# Altium PCB Power_Taghsim.PcbDoc
Units mil, origin at the board's own origin, x right, y up, seen from the top; angles counter-clockwise.
Board outline 4734.03 x 2142.03 mil, 2 copper layers (Top Layer, Bottom Layer); 48 components, 17 nets, 121 pads, 7 vias.
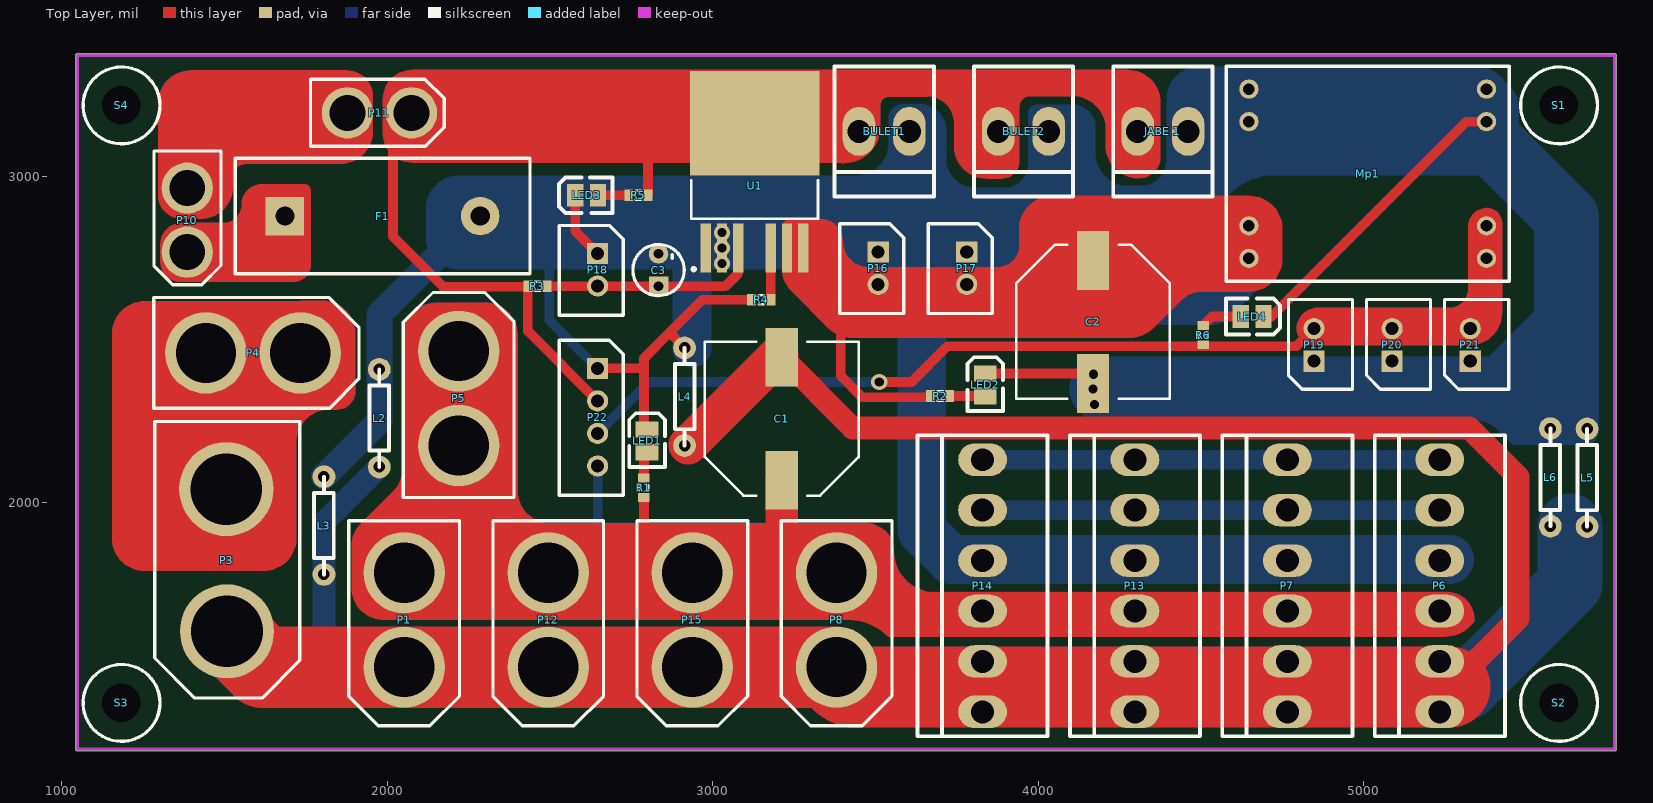
[diagram p0: Top Layer view]
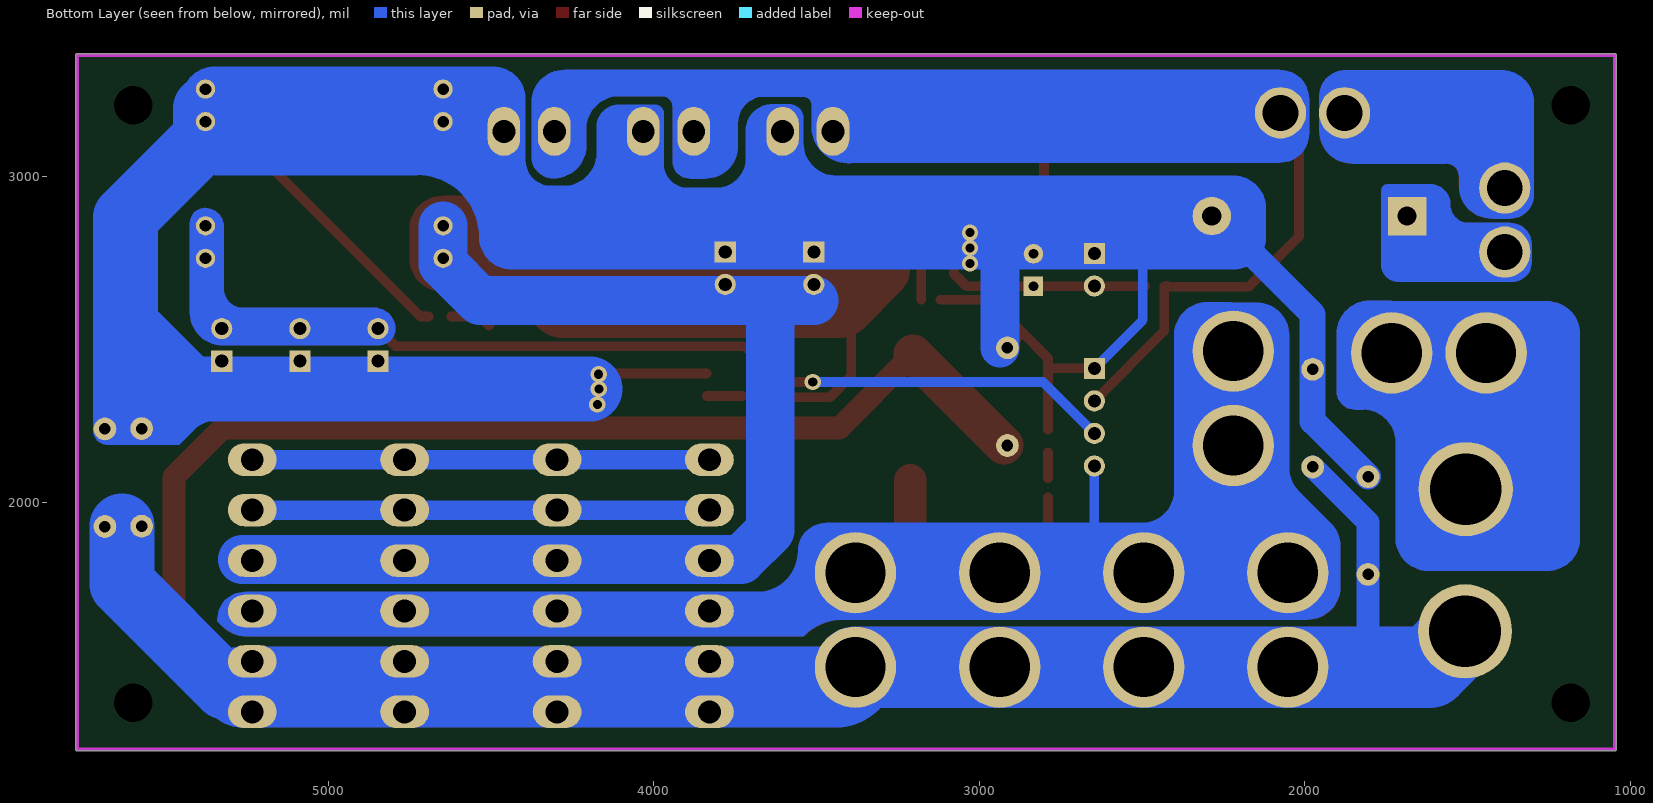
[diagram p1: Bottom Layer view, seen from below]

## Layer stack, top to bottom
Top Solder: solder mask 0.4, Solder Resist, Dk 3.5
Top Layer: signal copper 1.4
Dielectric 1: dielectric 12.6, FR-4, Dk 4.8
Bottom Layer: signal copper 1.4
Bottom Solder: solder mask 0.4, Solder Resist, Dk 3.5

## Board outline
1047,1235.98 cw(c1047,1241) 1041.98,1241 1041.98,3373 cw(c1047,3373) 1047,3378.01 5771,3378.01 cw(c5771,3373) 5776.02,3373 5776.02,1241 cw(c5771,1241) 5771,1235.98

## Design rules (kind name [scope] priority, off if disabled: settings)
AssemblyTestPointUsage [All] p1 off:
AssemblyTestpoint [All] p1 off: testpointundercomponent=TRUE minsize=40 maxsize=100 preferedsize=60 minholesize=0 maxholesize=40 preferedholesize=32 testpointgrid=1 usegrid=TRUE gridtolerance=0.01 allowsidetop=TRUE allowsidebottom=TRUE
Clearance Clearance_1 [All vs InPolygon] p1: gap=13 ignorepadtopadclearanceinfootprint=FALSE except(0: Arc-Hole Track-Hole SMDPad-Hole THPad-Hole Via-Hole Fill-Hole Poly-Hole Region-Hole Text-Hole)
Clearance [All] p2: gap=7 ignorepadtopadclearanceinfootprint=FALSE except(0: Arc-Hole Track-Hole SMDPad-Hole THPad-Hole Via-Hole Fill-Hole Poly-Hole Region-Hole Text-Hole)
ComponentClearance [All] p1 off: gap=10 collisioncheckmode=3 verticalgap=10 showdistances=FALSE
FabricationTestPointUsage [All] p1 off: valid=0 allowmultiple=FALSE
FabricationTestpoint [All] p1 off: side=3 testpointundercomponent=TRUE minsize=40 maxsize=100 preferedsize=60 minholesize=0 maxholesize=40 preferedholesize=32 testpointgrid=1 allowsidetop=TRUE allowsidebottom=TRUE usegrid=TRUE gridtolerance=0.01
Height [All] p1 off: minheight=0 maxheight=1000 prefheight=500
HoleSize [All] p1 off: absolutevalues=TRUE maxlimit=100 minlimit=1 maxpercent=80.000 minpercent=20.000
HoleToHoleClearance [All] p1 off: gap=10 allowstackedmicrovias=TRUE
LayerPairs [All] p1 off: enforce=TRUE
MinimumSolderMaskSliver [All] p1 off: minsoldermaskwidth=10
NetAntennae [All] p1 off: netantennaetolerance=0
PasteMaskExpansion [All] p1 off: expansion=0
PlaneConnect [All] p1: planeconnectstyle=Direct reliefexpansion=20 reliefentries=4 reliefconductorwidth=10 reliefairgap=10
PolygonConnect [All] p1: connectstyle=Direct reliefconductorwidth=10 reliefentries=4 polygonreliefangle="90 Angle" airgapwidth=10
RoutingVias [All] p1: holewidth=15.75 width=31.5 viastyle="Through Hole" minholewidth=11.81 minwidth=23.62 maxholewidth=28 maxwidth=50
SilkToSilkClearance [All] p1 off: silktosilkclearance=10
SilkToSolderMaskClearance [IsPad] p1 off: minsilkscreentomaskgap=10 clearancetoexposedcopper=TRUE
SolderMaskExpansion [All] p1 off: expansion=4
Width [All] p1: maxlimit=400 minlimit=10 preferedwidth=10
15 further rules are at their usual default settings.

## Components (designator, comment, footprint, x,y, rotation, side; value= is the part's Value field where it differs from the comment)
BULET1 "Ghofl dar" con2-tiwan 3526.5,3139 r0 top
BULET2 "Ghofl dar" con2-tiwan 3954.5,3139 r0 top
C1 "Cap Pol1" "Cap Alireza montazeri" 3243,2248 r90 top value=470uf
C2 "Cap Pol1" "Cap Alireza montazeri" 4136.61,2562.18 r270 top value=470uf
C3 "Cap Pol1" LED_3MM 2833,2713 r270 top value=470uf
F1 "20A Normal" FUSE 1985,2879 r180 top
"JABE 1" "Ghofl dar" con2-tiwan 4382.5,3139 r0 top
L2 "" R3P 1975,2258 r90 top value=100uH
L3 "" R3P 1805,1928 r90 top value=100uH
L4 "" R3P 2913,2324 r90 top value=100uH
L5 "" R3P 5686,2075 r90 top value=100uH
L6 "" R3P 5573,2076 r90 top value=100uH
LED1 "power" 3518 2798,2188 r90 top
LED2 "power" 3518 3837,2360 r90 top
LED3 "power" 3518 2612,2943 r180 top
LED4 "power" 3518 4657,2570 r0 top
Mp1 "Mp1584" MP1584_3A 4577,2679 r0 top
P1 "XT60" XT-60 2058,1640.32 r0 top
P3 "XT90" XT-90 1511,1824 r0 top
P4 "XT60" XT-60 1585,2465 r90 top
P5 "XT60" XT-60 2212.4,2316.68 r180 top
P6 "BUS connector" CON6-TIWAN 5233.5,1743 r270 top
P7 "BUS connector" CON6-TIWAN 4765.17,1743 r270 top
P8 "XT60" XT-60 3386.6,1640.32 r0 top
P10 "XT30" XT-30 1282.64,2665.79 r0 top
P11 "XT30" XT-30 2176.36,3093.64 r90 top
P12 "XT60" XT-60 2500.67,1640.32 r0 top
P13 "BUS connector" con6-tiwan 4296.83,1743 r270 top
P14 "BUS connector" con6-tiwan 3828.5,1743 r270 top
P15 "XT60" XT-60 2943.33,1640.32 r0 top
P16 "Fan" "JP CIRCULAR 2" 3508,2769 r270 top
P17 "Fan" "JP CIRCULAR 2" 3780,2769 r270 top
P18 "switch EN" "jp circular 2" 2646,2764 r270 top
P19 "" "JP CIRCULAR 2" 4847,2433 r90 top
P20 "" "JP CIRCULAR 2" 5087,2433 r90 top
P21 "" "JP CIRCULAR 2" 5327,2433 r90 top
P22 "Monitoring" "JP CIRCULAR 4" 2646,2411 r270 top
R1 "Res1" j1-0603 2788,2044 r90 top value=220
R2 "Res1" j1-0603 3698,2326 r0 top value=220
R3 "" j1-0603 2461,2663 r0 top value=10K
R4 "Res1" j1-0603 3148.47,2622 r0 top value=1K
R5 "Res1" j1-0603 2771,2943 r180 top value=220
R6 "Res1" j1-0603 4506,2513 r90 top value=220
S1 "Screw Hole" "Screw Holw 3-6 mm" 5600,3219 r0 top
S2 "Screw Hole" "Screw Holw 3-6 mm" 5600,1383 r0 top
S3 "Screw Hole" "Screw Holw 3-6 mm" 1183,1383 r0 top
S4 "Screw Hole" "Screw Holw 3-6 mm" 1183,3219 r0 top
U1 "BTS640S2G" TO127P1490X440-8_7N 3128,3015 r90 top

## Footprints (in the part's own frame and the unit in brackets; to place one, negate y for a bottom-side part, rotate by r counter-clockwise, add the part's x,y. Pads: shape width x height; smd on the part's side, far side on the other; paste and mask are expansions set on the pad)
3518 [mil]
  rect 50x70 smd: 1(35,0) 2(-35,0)
  silkscreen extent -80,-55 85,55, body extent -63,-31 63,32, height 43
"Cap Alireza montazeri" [mm]
  rect 4.6x2.5 smd: 1(-4.592,0.797) 2(5.008,0.797)
  silkscreen extent -5.79,-5.2 6.21,6.8, body extent -5.19,-4.6 5.61,6.2, height 6.9
con2-tiwan [mil]
  oval 100x150 hole 70: 1(-77.5,0) 2(77.5,0)
  silkscreen extent -152,-200 152,200
CON6-TIWAN [mil]
  oval 100x150 hole 70: 1(-387.5,0) 2(-232.5,0) 3(-77.5,0) 4(77.5,0) 5(232.5,0) 6(387.5,0)
  silkscreen extent -463,-200 463,200
con6-tiwan [mil]
  oval 100x150 hole 70: 1(-387.5,0) 2(-232.5,0) 3(-77.5,0) 4(77.5,0) 5(232.5,0) 6(387.5,0)
  silkscreen extent -463,-200 463,200
FUSE [mm]
  rect 3x3 hole 1.5: 1(7.62,0)
  round 3 hole 1.5: 2(-7.62,0)
  silkscreen extent -11.5,-4.5 11.5,4.5, body extent -11.6,-4.65 11.63,4.62, height 4
j1-0603 [mm] "Chip Resistor, Body 1.6x0.8mm, IPC High Density"
  rect 0.7x0.9 smd: 1(-0.75,0) 2(0.75,0)
  silkscreen extent -0.2,-0.35 0.2,0.35, body extent -0.85,-0.48 0.85,0.48, height 0.9
"JP CIRCULAR 2" [mil]
  rect 65x65 hole 40: 1(0,0)
  round 65 hole 40: 2(100,0)
  silkscreen extent -86,-118 190,79, body extent -96,-118 196,75, height 216
"jp circular 2" [mil]
  rect 65x65 hole 40: 1(0,0)
  round 65 hole 40: 2(100,0)
  silkscreen extent -86,-118 190,79, body extent -96,-118 196,75, height 216
"JP CIRCULAR 4" [mil]
  rect 65x65 hole 40: 1(0,0)
  round 65 hole 40: 2(100,0) 3(200,0) 4(300,0)
  silkscreen extent -86,-118 390,79, body extent -92,-118 396,74, height 216
LED_3MM [mil]
  rect 60x60 hole 30: 1(50,0)
  round 60 hole 30: 2(-50,0)
  silkscreen extent -79,-79 79,79, body extent -80,-78 80,76, height 118
MP1584_3A [mm]
  round 1.5 hole 0.9: 1(1.778,12.446) 1(1.778,14.986) 2(1.778,1.778) 2(1.778,4.318) 3(20.32,12.446) 3(20.32,14.986) 4(20.32,1.778) 4(20.32,4.318)
  silkscreen extent 0,0 22.1,16.76
R3P [mil]
  round 70 hole 35.43: 1(-150,0) 2(150,0)
  silkscreen extent -150,-30 150,30
"Screw Holw 3-6 mm" [mil]
  round 0 hole 118.11: 0(-1,0)
  silkscreen extent -118,-118 118,118
TO127P1490X440-8_7N [mm] "TO,1.27mm pitch;7 pin,14.90mm L X 9.20mm W X 4.40mm H body"
  rect 3.85x0.8 smd paste+0 mask+0: 1(-5.95,3.81) 2(-5.95,2.54) 3(-5.95,1.27) 5(-5.95,-1.27) 6(-5.95,-2.54) 7(-5.95,-3.81)
  rect 8.15x10.1 smd paste+0 mask+0: 8(3.8,0)
  silkscreen extent -7.72,-4.95 -0.65,4.95, body extent -7.47,-5 7.48,5, height 4.51
XT-30 [mm]
  round 4 hole 2.8: +(2.6,7.6) -(2.6,2.6)
  silkscreen extent 0,0.05 5.23,10.49, body extent 0.01,0.01 5.26,10.46, height 13.5
XT-60 [mil]
  round 250 hole 185: +(-6.6,142.68) -(-6.6,-147.32)
  silkscreen extent -177,-327 163,303, body extent -162,-309 153,305, height 646
XT-90 [mil]
  round 289.37 hole 220: +(-6,216) -(-4,-221)
  silkscreen extent -226,-426 220,424, body extent -226,-423 207,419, height 217

## Part data
BULET1 BULET2 "JABE 1" P1 P3 P4 P5 P8 P10 P11 P12 P15 P16 P17 P18 P19 P20 P21: library part "Header 2", "Header, 2-Pin", LatestRevisionDate=17-Jul-2002, LatestRevisionNote="Re-released for DXP Platform.", Publisher="Altium Limited"
C1 C2 C3: "Polarized Capacitor (Radial)", LatestRevisionDate=17-Jul-2002, LatestRevisionNote="Re-released for DXP Platform.", PackageReference=RB7.6-15, Published=8-Jun-2000, Publisher="Altium Limited"
F1: library part "Fuse 2", "Fuse", Manufacturer="Generic Components", Class=Passive, Published=08/06/2000, Publisher="Altium Hobart Technology Centre", SubClass=Fuse
L2 L3 L4 L5 L6: library part Inductor, "Inductor", Manufacturer="Generic Components", Class=Passive, Published=08/06/2000, Publisher="Altium Hobart Technology Centre", SubClass=Inductor
LED1 LED2 LED3 LED4: library part LED3, "Typical BLUE SiC LED", PackageDocument=16-Apr-2002, DatasheetDocument=16-Apr-2002, LatestRevisionDate=17-Dec-2003, LatestRevisionNote="PCB Footprint replaced.", PackageReference=3.5X2.8X1.9, Published=8-Jun-2000, Publisher="Altium Limited"
P6 P7 P13 P14: library part "Header 6", "Header, 6-Pin", LatestRevisionDate=17-Jul-2002, LatestRevisionNote="Re-released for DXP Platform.", Publisher="Altium Limited"
P22: library part "Header 4", "Header, 4-Pin", LatestRevisionDate=17-Jul-2002, LatestRevisionNote="Re-released for DXP Platform.", Publisher="Altium Limited"
R1 R2 R4 R5 R6: "Resistor", LatestRevisionDate=17-Jul-2002, LatestRevisionNote="Re-released for DXP Platform.", PackageReference=AXIAL-0.3, Published=8-Jun-2000, Publisher="Altium Limited"
R3: library part Res1, "Resistor", Manufacturer="Generic Components", Class=Passive, Published=08/06/2000, Publisher="Altium Hobart Technology Centre", SubClass=Resistor
U1: "Smart Sense High-Side Power Switch, VBB 43V, R(ON) 30mOhm", Manufacturer="Infineon Technologies", ManufacturerPartNumber=BTS640S2G, PackageReference=PG-TO263-7-2

## Via types
v1: diameter 50, hole 28, Top Layer to Bottom Layer, 7 vias

## Nets (pads, with @x,y where several pads share a name; then routed paths per layer and width w, separated by ;. In a path a pad name is that pad's centre, name@x,y a point inside that pad or via, vN(x,y) a via of type N, cw(c..) or ccw(c..) an arc to the next point about the centre after c; other vN are vias at no path point)
+5: Mp1.4 P19.2 P20.2 P21.2 P22.3 R6.1 | length 2334.4
  Top Layer w30: v1(3511,2369) 3611,2369 3721,2479 4793,2479 P19.2
  Bottom Layer w30: P22.3 2804,2369 v1(3511,2369)
+12: C2.1 Mp1.2 P6.3 P7.3 P13.3 P14.3 P16.2 P17.2 R2.1 U1.6 U1.7 | length 4125.1
  Top Layer w30: 3393,2540 3393,2388 3459,2322 3664.47,2322 R2.1
  Bottom Layer w150: 3507,2619 3642,2619 ; Mp1.2@4647,2849 4647,2749 4647,2732 4534,2619 3642,2619 ; P6.3@5264,1824 3731,1824 3642,1913 3642,2619
+16: C1.1 P1.+ P5.+ P5.- P6.4 P7.4 P8.+ P12.+ P13.4 P14.4 P15.+ P22.4 R1.1 | length 568.4
  Top Layer w30: 2788,1920 R1.1
  Top Layer w100: 3211.61,1878.61 C1.1
  Top Layer w180: 2219,1828.87 ccw(c2283.87,1828.87) 2238,1783
  Bottom Layer w30: P22.4 2646,1890.07 ccw(c2663.07,1890.07) 2651,1878
D+: P6.1 P7.1 P13.1 P14.1 | length 1405
  Bottom Layer w60: P14.1 P13.1 P7.1 P6.1
D-: P6.2 P7.2 P13.2 P14.2 | length 1405
  Bottom Layer w60: P14.2 P13.2 P7.2 P6.2
direct_12: "JABE 1.1" BULET1.1 BULET2.1 P11.- P22.2 R3.1 R5.1 U1.8 | length 1314.5
  Top Layer w30: 2017,3085 2017,2816 2171,2662 2420.47,2662 R3.1@2422.47,2664 ; R3.1 2431.47,2525.53 P22.2 ; R5.1 2800.53,3077.53
GND: "JABE 1.2" BULET1.2 BULET2.2 C2.2 C3.2 F1.2 L2.2 L3.2 L4.2 L5.2 L6.2 LED1.1 LED2.1 LED3.1 LED4.1 Mp1.1 Mp1.3 P16.1 P17.1 P18.1 P19.1 P20.1 P21.1 P22.1 R4.1 U1.2 | length 6223.9
  Top Layer w30: LED3.1 2577,2833 P18.1 ; P22.1 2787,2411 2788,2410 ; LED1.1@2788,2223 2788,2410 ; L4.2 2868,2519 2865,2519 ; R4.1 2968,2622 2865,2519 ; LED2.1 4167,2395 v1(4169,2393) ; LED4.1 4716,2570 5315,3169 Mp1.3@5377,3169 ; 2788,2410 2788,2442 2865,2519
  Bottom Layer w30: 2497,2759 2497,2560 P22.1
  Bottom Layer w80: L3.2 1975,2248 L2.2 1975,2577 2218,2820
  Bottom Layer w120: L4.2@2936,2474 2936,2794
  Bottom Layer w200: 4196,2347.82 5087,2347.82 5424.82,2347.82 5623,2546 5623,2874 5377,3120 5377,3169 5377,3209
  other v1: 4173,2300 4168.39,2347.82 3028,2733 3028,2780.75 3028,2828
IN_12: P10.+ P11.+
IN_16: P3.+ P4.+ P4.-
NetF1_1: F1.1 P10.-
NetLED1_1: LED1.2 R1.2 | length 79.5
  Top Layer w30: R1.2 LED1.2@2788,2153
NetLED2_1: LED2.2 R2.2 | length 109.9
  Top Layer w30: R2.2 3836,2326 LED2.2
NetLED3_1: LED3.2 R5.2 | length 94.5
  Top Layer w30: LED3.2 R5.2
NetLED4_1: LED4.2 R6.2 | length 127.4
  Top Layer w30: R6.2 4533.47,2570 LED4.2
NetR4_2: R4.2 U1.5 | length 158.7
  Top Layer w30: R4.2 U1.5
PGND: C1.2 L2.1 L3.1 L4.1 L5.1 L6.1 P1.- P3.- P6.5 P6.6 P7.5 P7.6 P8.- P12.- P13.5 P13.6 P14.5 P14.6 P15.- | length 12593.4
  Top Layer w70: C1.2@3203.61,2455.18 3212.58,2446.14 3428.79,2228 5324,2228 5474,2078 5474,1642 5264,1432
  Top Layer w120: L4.1@2924.21,2175.79 C1.2@3203.61,2455.18
  Top Layer w250: P3.- 1617,1493 P1.- P12.- P15.- P8.- ccw(c3441,1493) 3441,1432 5264,1432
  Bottom Layer w70: 1805,1493 L3.1 1805,1938 L2.1
  Bottom Layer w150: 5264,1432 5317,1432
  Bottom Layer w200: 5317,1432 5633,1748 5633,1926
  Bottom Layer w250: P3.- 1617,1493 1805,1493 P1.- P12.- P15.- P8.- ccw(c3441,1493) 3441,1432 5264,1432
Power_12_EN: C3.1 P18.2 R3.2 U1.3 | length 681.8
  Top Layer w30: R3.2 3038,2663 3078,2703 U1.3
pads on no net: S1.0 S2.0 S3.0 S4.0 U1.1

## Keep-outs
Keep-Out Layer:
  lines w10: 1047,1241 1047,3373 5771,3373 5771,1241 1047,1241

## Other copper
Top Layer:
  region net +5: 5379,2904 ccw(c5379,2846) 5321,2846 5321,2657 cw(c5261,2657) 5261,2597 4858,2597 ccw(c4858,2533) 4794,2533 ccw(c4845,2533) 4845,2482 5325,2482 ccw(c5325,2582) 5425,2582 5425,2857 ccw(c5378,2857) 5378,2904
  region net NetF1_1: 1711.41,2676.73 ccw(c1711.41,2729.73) 1764.41,2729.73 1764.41,2956.73 ccw(c1744.41,2956.73) 1744.41,2976.73 1614.41,2976.73 ccw(c1614.41,2914.73) 1552.41,2914.73 cw(c1495.41,2914.73) 1495.41,2857.73 1367.41,2857.73 ccw(c1367.41,2792.73) 1302.41,2792.73 1302.41,2736.73 ccw(c1362.41,2736.73) 1362.41,2676.73
  region net IN_12: 1368.92,2870.19 1425.92,2870.19 ccw(c1425.92,2970.19) 1525.92,2970.19 1525.92,2999.19 cw(c1565.92,2999.19) 1565.92,3039.19 1854.92,3039.19 ccw(c1854.92,3139.19) 1954.92,3139.19 1954.92,3247.19 ccw(c1875.92,3247.19) 1875.92,3326.19 1395.92,3326.19 ccw(c1395.92,3226.19) 1295.92,3226.19 1295.92,2943.19 ccw(c1368.92,2943.19)
  region net direct_12: 2076,3043 cw(c2076,3133) 1986,3133 1986,3238 cw(c2076,3238) 2076,3328 4275,3328 cw(c4275,3228) 4375,3228 4375,3061 cw(c4309,3061) 4309,2995 4307,2995 cw(c4307,3095) 4207,3095 4207,3147 ccw(c4107,3147) 4107,3247 3974,3247 ccw(c3974,3215) 3942,3215 3942,3048 cw(c3888,3048) 3888,2994 3841,2994 cw(c3841,3094) 3741,3094 3741,3165 ccw(c3660,3165) 3660,3246 3542,3246 ccw(c3542,3218) 3514,3218 3514,3139.02 cw(c3402,3154.45) 3383,3043
  region net +12: 3212.42,2842 cw(c3240.42,2842) 3240.42,2870 3330.42,2870 cw(c3330.42,2801) 3399.42,2801 ccw(c3478.42,2801) 3478.42,2722 3874.42,2722 ccw(c3874.42,2789) 3941.42,2789 3941.42,2841 cw(c4041.42,2841) 4041.42,2941 4649.42,2941 cw(c4649.42,2841) 4749.42,2841 4749.42,2747 cw(c4649.42,2747) 4649.42,2647 4506.84,2647 ccw(c4506.84,2547) 4436.13,2617.71 4352.71,2534.29 cw(c4282,2605) 4282,2505 3425.84,2505 cw(c3425.84,2605) 3355.13,2534.29 3241.71,2647.71 cw(c3312.42,2718.42) 3212.42,2718.42
  region net +16: 2223,2612 2147,2612 ccw(c2147,2512) 2047,2512 2047,2103.42 cw(c1947,2103.42) 2017.71,2032.71 1918,1933 ccw(c1985.6,1865.4) 1890,1865.4 1890,1738 ccw(c1990,1738) 1990,1638 3415.68,1638 cw(c3415.68,1463.88) 3538.8,1587 5252.58,1587 ccw(c5252.58,1687) 5323.29,1616.29 5340,1633 5340,1639 ccw(c5256,1639) 5256,1723 3682,1723 cw(c3682,1849) 3556,1849 ccw(c3470,1849) 3470,1935 2500,1935 cw(c2500,2035) 2400,2035 2400,2513 ccw(c2300,2513) 2300,2613 2225,2613
  region net IN_16: 1733,2617 1254,2617 ccw(c1254,2517) 1154,2517 1154,1889 ccw(c1254,1889) 1254,1789 1620,1789 ccw(c1620,1889) 1720,1889 1720,2184 cw(c1820,2184) 1820,2284 1845,2284 ccw(c1845,2340) 1901,2340 1901,2519 ccw(c1801,2519) 1801,2619 1733,2619
Bottom Layer:
  region net GND: 5722,2569 5722,2221 cw(c5677,2221) 5677,2176 5458,2176 5412.29,2221.71 ccw(c5341.58,2151) 5341.58,2251 5233,2251
  region net +5: 5379,2904 ccw(c5379,2846) 5321,2846 5321,2657 cw(c5261,2657) 5261,2597 4858,2597 ccw(c4858,2533) 4794,2533 ccw(c4845,2533) 4845,2482 5325,2482 ccw(c5325,2582) 5425,2582 5425,2857 ccw(c5378,2857) 5378,2904
  region net NetF1_1: 1711.41,2676.73 ccw(c1711.41,2729.73) 1764.41,2729.73 1764.41,2956.73 ccw(c1744.41,2956.73) 1744.41,2976.73 1614.41,2976.73 ccw(c1614.41,2914.73) 1552.41,2914.73 cw(c1495.41,2914.73) 1495.41,2857.73 1367.41,2857.73 ccw(c1367.41,2792.73) 1302.41,2792.73 1302.41,2736.73 ccw(c1362.41,2736.73) 1362.41,2676.73
  region net IN_12: 1368.23,2871.22 1425.23,2871.22 ccw(c1425.23,2971.22) 1525.23,2971.22 1525.23,3000.22 cw(c1565.23,3000.22) 1565.23,3040.22 1854.23,3040.22 ccw(c1854.23,3140.22) 1954.23,3140.22 1954.23,3248.22 ccw(c1875.23,3248.22) 1875.23,3327.22 1395.23,3327.22 ccw(c1395.23,3227.22) 1295.23,3227.22 1295.23,2944.22 ccw(c1368.23,2944.22)
  region net direct_12: 2076,3043 cw(c2076,3133) 1986,3133 1986,3238 cw(c2076,3238) 2076,3328 4275,3328 cw(c4275,3228) 4375,3228 4375,3061 cw(c4309,3061) 4309,2995 4307,2995 cw(c4307,3095) 4207,3095 4207,3147 ccw(c4107,3147) 4107,3247 3974,3247 ccw(c3974,3215) 3942,3215 3942,3048 cw(c3888,3048) 3888,2994 3841,2994 cw(c3841,3094) 3741,3094 3741,3165 ccw(c3660,3165) 3660,3246 3542,3246 ccw(c3542,3218) 3514,3218 3514,3139.02 cw(c3402,3154.45) 3383,3043
  region net GND: 2219,3003 ccw(c2219,2903) 2119,2903 2119,2815 ccw(c2219,2815) 2219,2715 4436,2715 ccw(c4436,2815) 4536,2815 cw(c4726,2815) 4726,3005 5349,3005 ccw(c5349,3105) 5449,3105 5449,3238 ccw(c5349,3238) 5349,3338 4494,3338 ccw(c4494,3238) 4394,3238 4394,3050 cw(c4316,3050) 4316,2972 4275,2972 cw(c4275,3072) 4175,3072 4175,3153 ccw(c4107,3153) 4107,3221 3994,3221 ccw(c3994,3196) 3969,3196 3969,3039 cw(c3896,3039) 3896,2966 3806,2966 cw(c3806,3055) 3717,3055 3717,3141 ccw(c3635,3141) 3635,3223 3584,3223 ccw(c3584,3179) 3540,3179 3540,3103 cw(c3440,3103) 3440,3003
  region net +16: 2223.42,2613 2147.42,2613 ccw(c2147.42,2513) 2047.42,2513 2047.42,2104.42 cw(c1947.42,2104.42) 2018.13,2033.71 1918.42,1934 ccw(c1986.02,1866.4) 1890.42,1866.4 1890.42,1739 ccw(c1990.42,1739) 1990.42,1639 3416.1,1639 cw(c3416.1,1464.88) 3539.22,1588 5253,1588 ccw(c5253,1688) 5323.71,1617.29 5340.42,1634 5340.42,1640 ccw(c5256.42,1640) 5256.42,1724 3682.42,1724 cw(c3682.42,1850) 3556.42,1850 ccw(c3470.42,1850) 3470.42,1936 2500.42,1936 cw(c2500.42,2036) 2400.42,2036 2400.42,2514 ccw(c2300.42,2514) 2300.42,2614 2225.42,2614
  region net IN_16: 1733,2617 1254,2617 ccw(c1254,2517) 1154,2517 1154,1889 ccw(c1254,1889) 1254,1789 1620,1789 ccw(c1620,1889) 1720,1889 1720,2184 cw(c1820,2184) 1820,2284 1845,2284 ccw(c1845,2340) 1901,2340 1901,2519 ccw(c1801,2519) 1801,2619 1733,2619

## Silkscreen, mask and mechanical layers (free items; w line width, h text height)
Bottom Solder:
  region: 5721,2570 5721,2222 cw(c5676,2222) 5676,2177 5457,2177 5411.29,2222.71 ccw(c5340.58,2152) 5340.58,2252 5232,2252
  region: 2286,2975 2241,2975 ccw(c2241,2882) 2148,2882 2148,2837 ccw(c2248,2837) 2248,2737 4416,2737 ccw(c4416,2837) 4516,2837 4516,2876.58 cw(c4616,2876.58) 4545.29,2947.29 4617,3019 cw(c4667.7,2968.3) 4667.7,3040 5312,3040 ccw(c5312,3140) 5412,3140 5412,3248 ccw(c5346,3248) 5346,3314 4508,3314 ccw(c4508,3214) 4408,3214 4408,3055 cw(c4308,3055) 4308,2955 4240,2955 cw(c4240,3055) 4140,3055 4140,3151 ccw(c4077,3151) 4077,3214 4023,3214 ccw(c4023,3173) 3982,3173 3982,3034 cw(c3896,3034) 3896,2948 3795,2948 cw(c3795,3048) 3695,3048 3695,3135 ccw(c3616,3135) 3616,3214 3604,3214 ccw(c3604,3163) 3553,3163 3553,3076 cw(c3453,3076) 3453,2976 3433,2976
  region: 1991,3196 ccw(c2074,3196) 2074,3113 3382,3113 cw(c3382,3099) 3396,3099 ccw(c3434,3099) 3434,3061 3456,3061 ccw(c3456,3107) 3502,3107 3502,3235 cw(c3530,3235) 3530,3263 3687,3263 cw(c3687,3175) 3775,3175 3775,3122 ccw(c3875,3122) 3875,3022 3876,3022 ccw(c3876,3078) 3932,3078 3932,3230 cw(c3964,3230) 3964,3262 4132,3262 cw(c4132,3162) 4232,3162 4232,3089 ccw(c4306,3089) 4306,3015 ccw(c4306,3069) 4360,3069 4360,3217 ccw(c4260,3217) 4260,3317 2092,3317 ccw(c2092,3217) 1992,3217 1992,3196
  region: 1385,2882 ccw(c1385,2965) 1468,2965 1468,3030 cw(c1552,3030) 1552,3114 1877,3114 ccw(c1877,3196) 1959,3196 1959,3197 ccw(c1877,3197) 1877,3279 1417,3279 ccw(c1417,3179) 1317,3179 1317,2950 ccw(c1385,2950)
  region: 1306,2766 ccw(c1381,2766) 1381,2691 1645,2691 ccw(c1645,2791) 1745,2791 1745,2908 ccw(c1692,2908) 1692,2961 1649,2961 ccw(c1649,2911) 1599,2911 cw(c1534,2911) 1534,2846 1386,2846 ccw(c1386,2766)
  region: 1426,2585.5 ccw(c1426,2485.5) 1326,2485.5 1326,1994.5 ccw(c1426,1994.5) 1426,1894.5 1560,1894.5 ccw(c1560,1994.5) 1660,1994.5 1660,2239.5 cw(c1747,2239.5) 1747,2326.5 1770,2326.5 ccw(c1770,2426.5) 1870,2426.5 1870,2485.5 ccw(c1770,2485.5) 1770,2585.5
  lines w80: 3435,1778 3481,1778 3593.5,1665.5 3828.5,1665.5 4296.83,1665.5 4765.17,1665.5 5233.5,1665.5
  lines w100: 3507,2619 3642,2619 ; 4647,2849 4647,2749 4647,2732 4534,2619 3642,2619 ; 5264,1824 3731,1824 3642,1913 3642,2619
  lines w180: 1507,1603 1700,1410 5293,1410 5634,1751 5634,1928 ; 2051.4,1783 2238,1783 2494.07,1783 2936.73,1783 3430,1783 3435,1778 ; 2219,1828.87 2219,2174 2219,2464 ; 3442,1433 3465,1410
  lines w200: 4195,2348.82 5086,2348.82 5423.82,2348.82 5622,2547 5622,2875 5376,3121